# EAGLE board rapidshark-main-breakout-mk-1.1 (EAGLE 6.5.0)
VERSION: v1.1
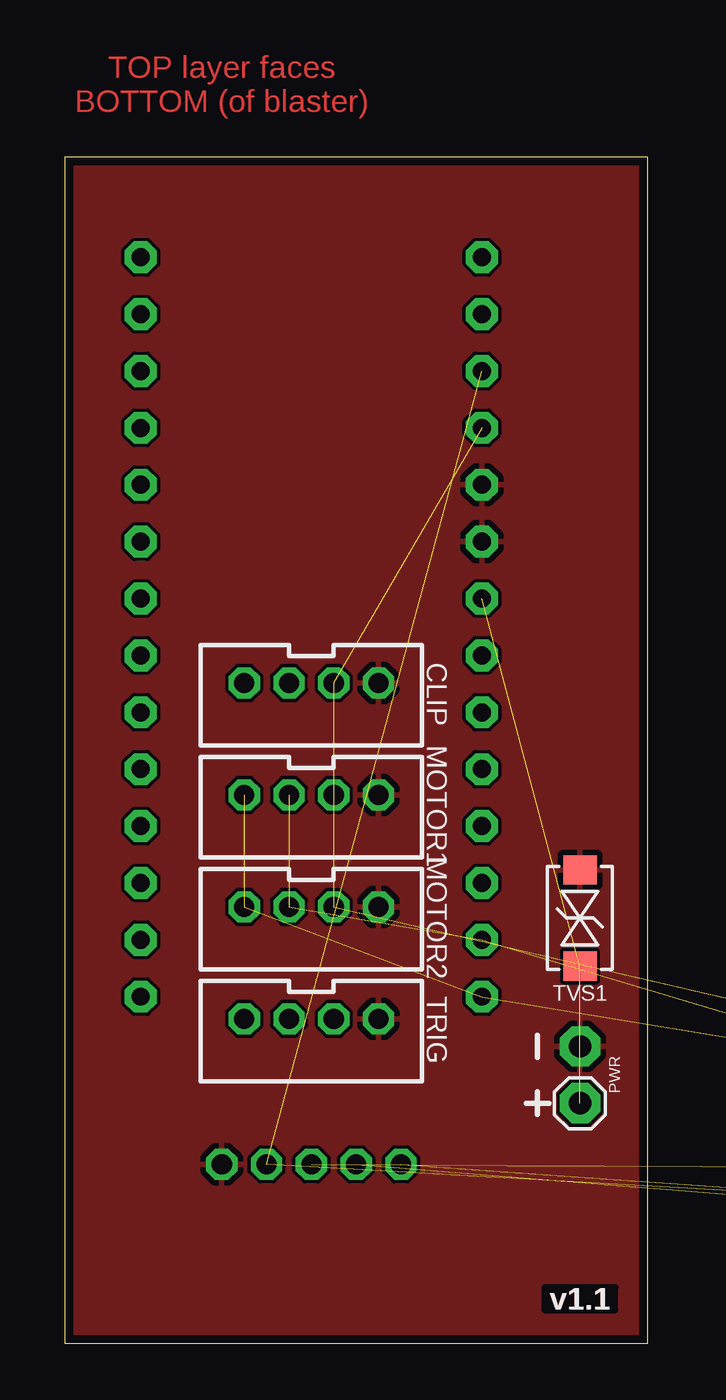
[diagram p0: board, top side]
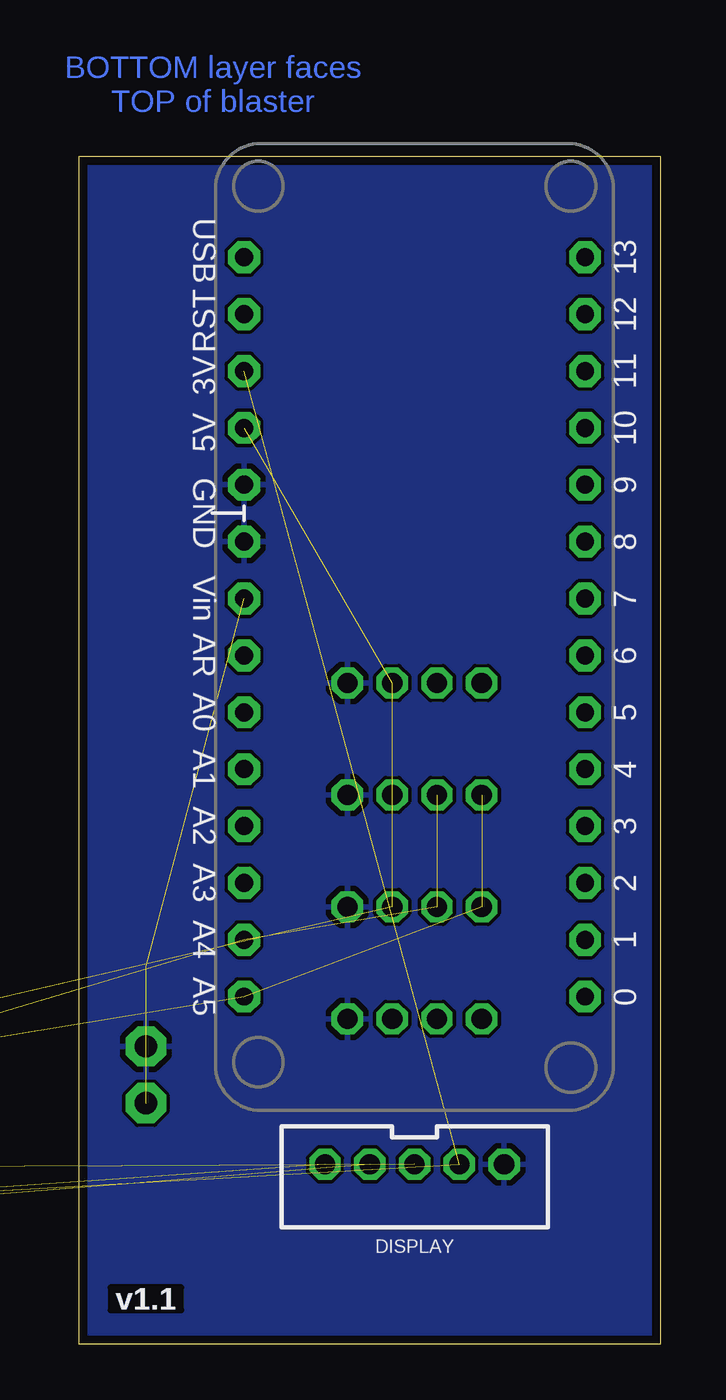
[diagram p1: board, bottom side, seen from below]

Size 26 x 53 mm. Coordinates in mm from the lower left corner, seen from the top.
Outline: 26,0 0,0 0,53 26,53 26,0
Copper layers (1*16): Top 0.0356mm / dielectric 1.5011mm / Bottom 0.0356mm
Design rules "LaenPCBOrder_2": minimum track width 6mil, minimum drill 13mil, track to track 6mil, track to pad 6mil, pad to pad 6mil, via to via 6mil, smd to smd 6mil, copper to edge 15mil, drill to drill 6mil, minimum pad ring 7mil, minimum via ring 7mil, stop-mask expansion 3mil, vias tented up to drill 20mil, thermal gap 10mil

## Footprints (pad centres in the part's own frame; a part is rotated, then mirrored left to right if it is on the bottom)
JST-4-PH-VERT-PTH = drill 0.9 pad 1.4 octagon: 1 0,0; 2 2,0; 3 4,0; 4 6,0
JST-5-PH-VERT-PTH = drill 0.9 pad 1.4 octagon: 1 -4,0; 2 -2,0; 3 0,0; 4 2,0; 5 4,0
1X02-CENTER-R+ = drill 1 pad 1.8 octagon: 1 -1.27,0; 2 1.27,0
SOT23 = smd 1 x 1.2: 1 -0.95,-1; 2 0.95,-1; 3 0,1
R0603 = smd 1 x 1.1: 1 -0.85,0; 2 0.85,0
SMA-DIODE-TVS-BIDIR = smd 1.3 x 1.5: 1 -2.15,0; 2 2.15,0
ADAFRUIT_METRO_MINI_OUTSIDER = drill 0.8 pad 1.422 octagon: 1 16.51,7.62; 2 13.97,7.62; 3 11.43,7.62; 4 8.89,7.62; 5 6.35,7.62; 6 3.81,7.62; 7 1.27,7.62; 8 -1.27,7.62; 9 -3.81,7.62; 10 -6.35,7.62; 11 -8.89,7.62; 12 -11.43,7.62; 13 -13.97,7.62; 14 -16.51,7.62; 15 -16.51,-7.62; 16 -13.97,-7.62; 17 -11.43,-7.62; 18 -8.89,-7.62; 19 -6.35,-7.62; 20 -3.81,-7.62; 21 -1.27,-7.62; 22 1.27,-7.62; 23 3.81,-7.62; 24 6.35,-7.62; 25 8.89,-7.62; 26 11.43,-7.62; 27 13.97,-7.62; 28 16.51,-7.62

## Placement (x,y rotation side)
CLIP  M04JST-PTH-VERT  [JST-4-PH-VERT-PTH]  14,29.5 180 top
DISPLAY  M05JST-PH-VERT-PTH  [JST-5-PH-VERT-PTH]  11,8 180 bottom
FRAME1  FRAME-LETTERNO_PACKAGE  [DUMMY]  0,0 0 bottom
MOTOR1  M04-I2CJST-4-PH-VERT-NS  [JST-4-PH-VERT-PTH]  14,24.5 180 top
MOTOR2  M04-I2CJST-4-PH-VERT-NS  [JST-4-PH-VERT-PTH]  14,19.5 180 top
PWR  M02PTH-CENTERED-R+  [1X02-CENTER-R+]  23,12 270 top
Q1  IRLML2502  [SOT23]  45,6 180 top  (outside the outline)
Q2  IRLML2502  [SOT23]  52,6 180 top  (outside the outline)
Q3  IRLML2502  [SOT23]  59,6 180 top  (outside the outline)
R1  10k  [R0603]  41.5,7 90 top  (outside the outline)
R2  10k  [R0603]  45,11 270 top  (outside the outline)
R3  10k  [R0603]  48.5,6 270 top  (outside the outline)
R4  10k  [R0603]  51,11 270 top  (outside the outline)
R5  10k  [R0603]  55.5,6 270 top  (outside the outline)
R6  10k  [R0603]  57,11 270 top  (outside the outline)
TRIG  M04JST-PTH-VERT  [JST-4-PH-VERT-PTH]  14,14.5 180 top
TVS1  [SMA-DIODE-TVS-BIDIR]  23,19 90 top
U1  [ADAFRUIT_METRO_MINI_OUTSIDER]  11,32 270 bottom

## Library data of the parts
CLIP DISPLAY MOTOR1 MOTOR2 PWR Q1-Q3 R1-R6 TRIG TVS1 U1 = A_butts
FRAME1 = A_butts; DESIGNER: sean@yak.net; VERSION: v1.2

## Nets
3.3V: DISPLAY.2 R1.1 R3.1 R5.1 U1.17
5V: CLIP.2 MOTOR1.2 MOTOR2.2 Q1.1 Q2.1 Q3.1 R2.1 R4.1 R6.1 U1.18
!CS: U1.11
ACCEL: TRIG.4
CLIP: CLIP.4
DART: CLIP.3
DISP_RST_3V3: DISPLAY.5 Q3.3 R5.2
DISP_RST_5V: Q3.2 R6.2
FIRE: TRIG.3
GND: CLIP.1 DISPLAY.1 MOTOR1.1 MOTOR2.1 PWR.1 TRIG.1 TVS1.2 U1.19 U1.20
MISO: U1.13
MOSI: U1.12
PUSH: TRIG.2
SCK: U1.14
SCL_3V3: DISPLAY.4 Q2.3 R3.2
SCL_5V: MOTOR1.4 MOTOR2.4 Q2.2 R4.2 U1.28
SDA_3V3: DISPLAY.3 Q1.3 R1.2
SDA_5V: MOTOR1.3 MOTOR2.3 Q1.2 R2.2 U1.27
VIN: PWR.2 TVS1.1 U1.21

## Tracks (layer width: path | path; a pad name or v marks a point on that pad's centre or on a via)
3.3V  (4 unrouted)
5V  (9 unrouted)
DISP_RST_3V3  (2 unrouted)
DISP_RST_5V  (1 unrouted)
GND
  pour Top (rank 6): 0,0 0,53 26,53 26,0
  pour Bottom (rank 6): 0,0 0,53 26,53 26,0
SCL_3V3  (2 unrouted)
SCL_5V  (4 unrouted)
SDA_3V3  (2 unrouted)
SDA_5V  (4 unrouted)
VIN  (2 unrouted)

## Text on the board
Top: TOP layer faces / BOTTOM (of blaster)
Bottom: BOTTOM layer faces / TOP of blaster
Reference: BARREL | RIGHT / main assembly | LEFT / shell cover | BUTT
tDocu: TOP layer faces / BOTTOM (of blaster)
bDocu: BOTTOM layer faces / TOP of blaster